# Altium PCB 不带sbus的8通接收机.PcbDoc
Units mm, origin at the board's own origin, x right, y up, seen from the top; angles counter-clockwise.
Board outline 25.4 x 22.35 mm, 2 copper layers (Top Layer, Bottom Layer), stack 1.271 mm thick; 17 components, 29 nets, 96 pads, 46 vias.
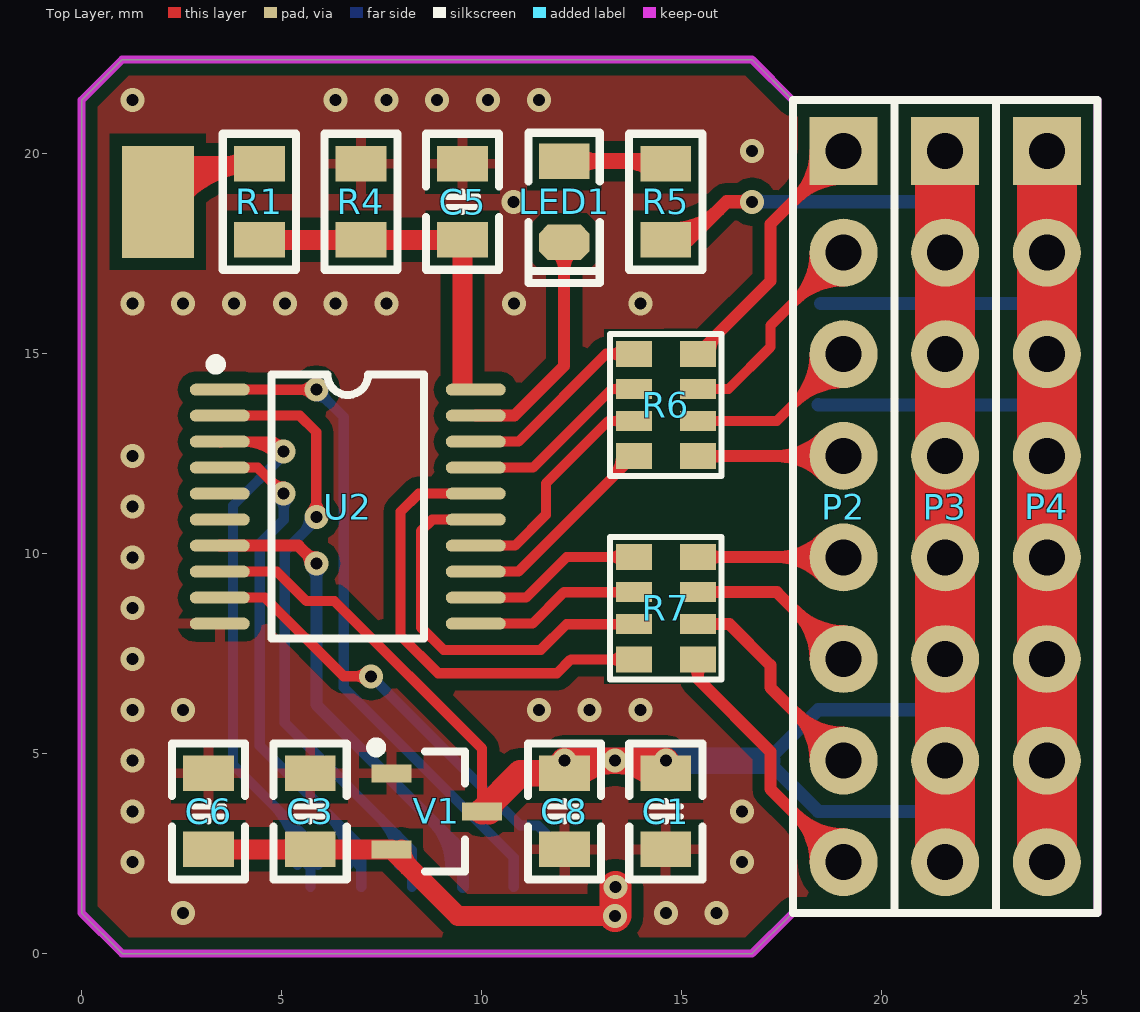
[diagram p0: Top Layer view]
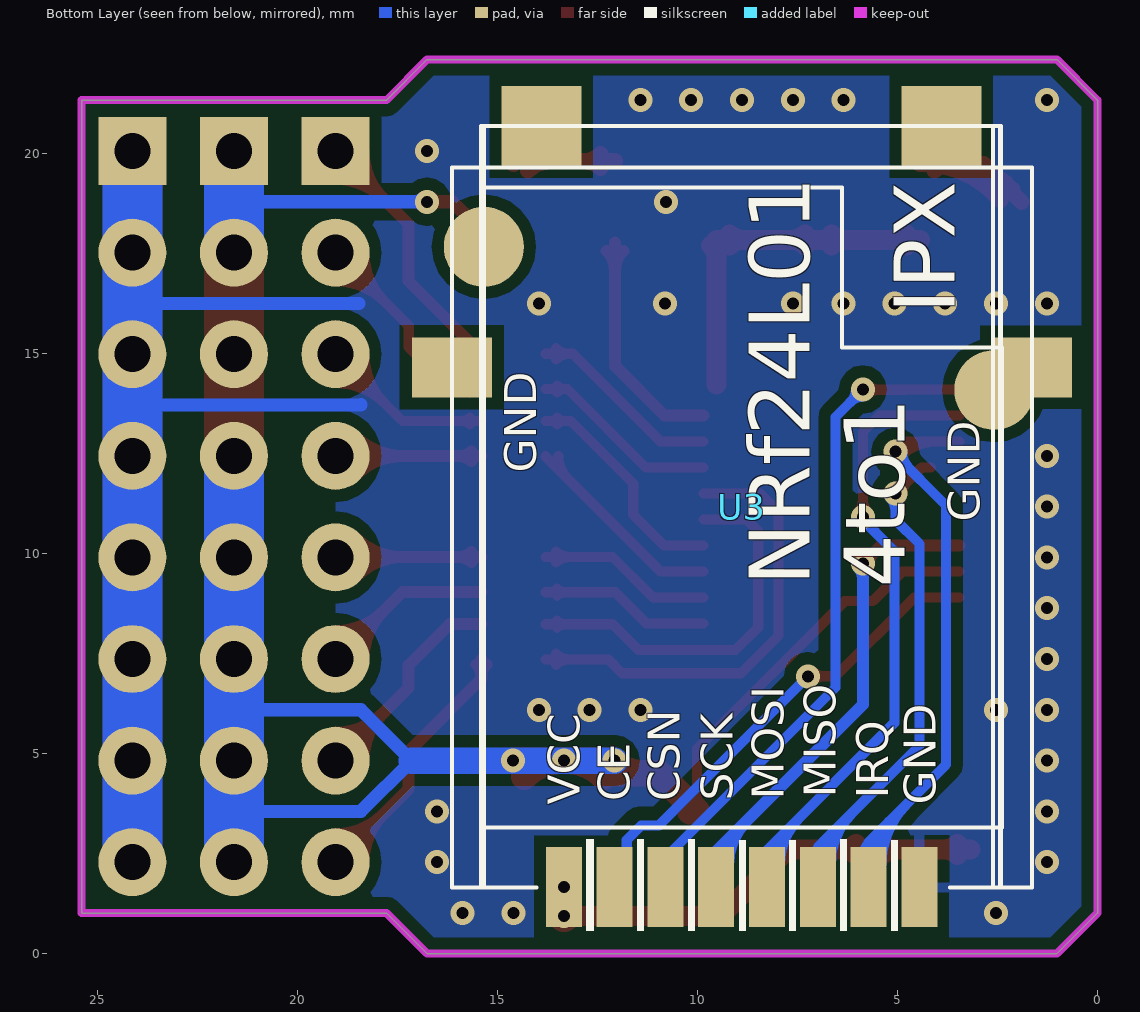
[diagram p1: Bottom Layer view, seen from below]

## Layer stack, top to bottom
Top Solder: solder mask 0.0102, Solder Resist, Dk 3.5
Top Layer: signal copper 0.0356
Dielectric1: core 1.2, FR-4, Dk 4.8
Bottom Layer: signal copper 0.0356
Bottom Solder: solder mask 0.0102, Solder Resist, Dk 3.5

## Board outline
0,1.016 1.016,0 16.764,0 17.78,1.016 25.4,1.016 25.4,21.336 17.78,21.336 16.764,22.352 1.016,22.352 0,21.336

## Design rules (kind name [scope] priority, off if disabled: settings)
Clearance [All] p1: gap=0.2 ignorepadtopadclearanceinfootprint=FALSE except(0.3: Arc-Text Track-Text)
ComponentClearance [All] p1 off: gap=0.254 collisioncheckmode=3 verticalgap=0.254 showdistances=FALSE
Creepage [All] p1: checkdistance=0.254
PolygonConnect PolygonConnect_1 [All] p1: connectstyle=Relief reliefconductorwidth=0.254 reliefentries=4 polygonreliefangle="90 Angle" airgapwidth=0.254
PolygonConnect GND [InNet('GND')] p2: connectstyle=Direct reliefconductorwidth=0.254 reliefentries=4 polygonreliefangle="90 Angle" airgapwidth=0.254
RoutingVias [All] p1: holewidth=0.711 width=1.27 viastyle="Through Hole" minholewidth=0.711 minwidth=1.27 maxholewidth=0.711 maxwidth=1.27
SilkToSolderMaskClearance SilkscreenOverComponentPads [IsPad] p1: minsilkscreentomaskgap=0.254 clearancetoexposedcopper=TRUE
SolderMaskExpansion [All] p1: expansion=0.102 istentingtop=FALSE
UnRoutedNet [All] p1: checkbadconnections=TRUE
Width [All] p1: maxlimit=2 minlimit=0.254 preferedwidth=0.254
27 further rules are at their usual default settings.

## Components (designator, comment, footprint, x,y, rotation, side; value= is the part's Value field where it differs from the comment)
C1 "10V10uF" "C 0805_L" 14.605,3.556 r90 top
C3 "10V10uF" "C 0805_L" 5.715,3.556 r270 top
C5 "0.1uF" "C 0805_L" 9.525,18.796 r270 top
C6 "0.1uF" "C 0805_L" 3.175,3.556 r270 top
C8 "0.1uF" "C 0805_L" 12.072,3.556 r90 top
LED1 "蓝色" "LED 0805B" 12.065,18.796 r270 top
P2 "Header 8" HDR2.54-LI-8P 19.05,11.176 r270 top
P3 "Header 8" HDR2.54-LI-8P 21.59,11.176 r270 top
P4 "Header 8" HDR2.54-LI-8P 24.13,11.176 r270 top
R1 "20K" "R 0805_L" 4.445,18.796 r270 top
R4 "10K" "R 0805_L" 6.985,18.796 r270 top
R5 "1K" "R 0805_L" 14.605,18.796 r270 top
R6 "1K" RCA-8P4R-0603 14.605,13.716 r270 top
R7 "1K" RCA-8P4R-0603 14.605,8.636 r270 top
U2 "STC15W408AS_TSSOP20" TSSOP20_N 6.655,11.176 r0 top
U3 "nrf24l01" NRF24L01_4TO1 8.89,11.176 r180 bottom
V1 "662K" SOT23-3L 8.89,3.556 r270 top

## Footprints (in the part's own frame and the unit in brackets; to place one, negate y for a bottom-side part, rotate by r counter-clockwise, add the part's x,y. Pads: shape width x height; smd on the part's side, far side on the other; paste and mask are expansions set on the pad)
"C 0805_L" [mil]
  rect 35x50 smd: 1(-37.4,0) 2(37.4,0)
  silkscreen extent -67,-36 67,36, body extent -39,-24 39,24, height 20
HDR2.54-LI-8P [mm]
  rect 1.7x1.7 hole 0.9: 1(-8.89,0)
  round 1.7 hole 0.9: 2(-6.35,0) 3(-3.81,0) 4(-1.27,0) 5(1.27,0) 6(3.81,0) 7(6.35,0) 8(8.89,0)
  silkscreen extent -10.16,-1.27 10.16,1.27, body extent -10.16,-1.27 10.16,1.27, height 8.5
"LED 0805B" [mil]
  rect 35x50 smd: 1(-40,0)
  oct 35x50 smd: 2(40,0)
  silkscreen extent -68,-35 80,35, body extent -39,-25 39,25, height 32
NRF24L01_4TO1 [mm]
  rect 2x1.5 smd: 0(-7.25,3.482) 0(7.25,3.482)
  round 2 smd: 0(-6.452,6.495) 0(6.308,2.915)
  rect 0.9x2 smd: 1(-4.453,-9.512) 2(-3.183,-9.512) 3(-1.913,-9.512) 4(-0.643,-9.512) 5(0.627,-9.512) 6(1.897,-9.512) 7(3.167,-9.512) 8(4.437,-9.512)
  rect 2x2 smd: 9(-5.015,9.512) 10(4.985,9.512)
  silkscreen extent -7.25,-10.61 7.25,9.51, body extent -7.19,-9.5 7.21,9.53, height 2.1
"R 0805_L" [mil]
  rect 35x50 smd: 1(-37.4,0) 2(37.4,0)
  silkscreen extent -67,-36 67,36, body extent -39,-25 39,25, height 20
RCA-8P4R-0603 [mm]
  rect 0.65x0.9 smd: 1(-1.28,-0.8) 4(1.28,-0.8) 5(1.28,0.8) 8(-1.28,0.8)
  rect 0.5x0.9 smd: 2(-0.4,-0.8) 3(0.4,-0.8) 6(0.4,0.8) 7(-0.4,0.8)
  silkscreen extent -1.78,-1.4 1.78,1.4, body extent -1.6,-0.8 1.6,0.8, height 0.6
SOT23-3L [mm] "3x1.3"
  rect 0.45x1 smd: 1(-0.95,-1.143) 2(0.95,-1.143) 3(0,1.125)
  silkscreen extent -1.72,-1.65 1.5,0.7, body extent -1.5,-1.2 1.5,1.2, height 1.05
TSSOP20_N [mm]
  oval 1.5x0.3 smd: 1(-3.2,2.925) 2(-3.2,2.275) 3(-3.2,1.625) 4(-3.2,0.975) 5(-3.2,0.325) 6(-3.2,-0.325) 7(-3.2,-0.975) 8(-3.2,-1.625) 9(-3.2,-2.275) 10(-3.2,-2.925) 11(3.2,-2.925) 12(3.2,-2.275) 13(3.2,-1.625) 14(3.2,-0.975) 15(3.2,-0.325) 16(3.2,0.325) 17(3.2,0.975) 18(3.2,1.625) 19(3.2,2.275) 20(3.2,2.925)
  silkscreen extent -3.43,-3.3 1.9,3.69, body extent -3.2,-3.25 3.2,3.25, height 1.03

## Part data
LED1: library part LED-SMD, "贴?"
U2: library part "STC15W401AS_SOP20_DIP20 _TSS"

## Free pads (board coordinates)
  rect 1.8x2.8 smd: 1(1.905,18.796)

## Via types
v1: diameter 0.6, hole 0.3, Top Layer to Bottom Layer, tented both sides, 46 vias

## Nets (pads, with @x,y where several pads share a name; then routed paths per layer and width w, separated by ;. In a path a pad name is that pad's centre, name@x,y a point inside that pad or via, vN(x,y) a via of type N, cw(c..) or ccw(c..) an arc to the next point about the centre after c; other vN are vias at no path point)
3.3V: C3.2 C6.2 U3.1 V1.2 | length 14.3
  Top Layer w0.5: C6.2 V1.2 9.413,0.94 v1(13.335,0.94) ; C6.2@3.503,2.469 cw(c3.835,2.137) 3.835,2.606 cw(c3.835,3.076) C6.2@3.503,2.744 ; C3.2@5.387,2.469 ccw(c5.055,2.137) 5.055,2.606 ccw(c5.055,3.076) C3.2@5.387,2.744 ; C3.2@6.043,2.469 cw(c6.375,2.137) 6.375,2.606 cw(c6.375,3.076) C3.2@6.043,2.744 ; V1.2@7.997,2.606 ccw(c8.601,2.606) 8.174,2.179
  Top Layer w0.8: v1(13.335,0.94) 13.343,0.948 v1(13.343,1.664)
3S: pad.1 R1.1 | length 8.1
  Top Layer w0.4: pad.1 2.855,19.746 R1.1 ; pad.1@2.13,19.098 cw(c3.561,17.842) 3.561,19.746 ; pad.1@2.431,18.834 cw(c4.445,17.067) R1.1 ; pad.1@2.605,19.296 cw(c3.088,19.296) pad.1@2.746,19.637 ; R1.1@4.082,19.573 ccw(c3.664,19.156) 3.664,19.746 ccw(c3.664,20.336) R1.1@4.082,19.919
ADC: C5.2 R1.2 R4.2 U2.20 | length 12.4
  Top Layer w0.5: R1.2 R4.2 C5.2 U2.20@9.525,14.224 ; R1.2@4.773,17.709 cw(c5.105,17.377) 5.105,17.846 cw(c5.105,18.316) R1.2@4.773,17.984 ; R4.2@6.657,17.709 ccw(c6.325,17.377) 6.325,17.846 ccw(c6.325,18.316) R4.2@6.657,17.984 ; R4.2@7.313,17.709 cw(c7.645,17.377) 7.645,17.846 cw(c7.645,18.316) R4.2@7.313,17.984 ; C5.2@9.197,17.709 ccw(c8.865,17.377) 8.865,17.846 ccw(c8.865,18.316) C5.2@9.197,17.984 ; C5.2@9.387,17.709 cw(c9.055,17.377) 9.525,17.377 cw(c9.994,17.377) C5.2@9.662,17.709
CE: U2.9 U3.2 | length 11.9
  Top Layer w0.254: U2.9 4.586,8.901 6.553,6.934 v1(7.239,6.934) ; v1@7.117,6.812 ccw(c6.821,6.517) 6.821,6.934 ccw(c6.821,7.352) v1@7.117,7.057
  Bottom Layer w0.254: v1(7.239,6.934) 10.969,3.204 11.407,3.204 11.77,2.841 U3.2@11.77,2.376
CH1: R6.1 U2.18 | length 5.6
  Top Layer w0.254: U2.18 10.921,12.801 13.116,14.996 R6.1 ; R6.1@13.54,14.856 ccw(c13.202,14.518) 13.202,14.996 ccw(c13.202,15.474) R6.1@13.54,15.136
CH2: R6.2 U2.17 | length 5.2
  Top Layer w0.254: U2.17 11.287,12.151 13.252,14.116 R6.2 ; R6.2@13.518,14.029 ccw(c13.308,13.819) 13.308,14.116 ccw(c13.308,14.413) R6.2@13.518,14.203
CH3: R6.3 U2.14 | length 6.2
  Top Layer w0.254: U2.14 10.836,10.201 11.608,10.973 11.608,11.753 13.171,13.316 R6.3 ; R6.3@13.518,13.229 ccw(c13.308,13.019) 13.308,13.316 ccw(c13.308,13.613) R6.3@13.518,13.403
CH4: R6.4 U2.13 | length 5.8
  Top Layer w0.254: U2.13 10.92,9.551 R6.4 ; 13.254,11.885 ccw(c12.702,12.436) R6.4@13.482,12.436
CH5: R7.1 U2.12 | length 5.1
  Top Layer w0.254: U2.12 11.111,8.901 12.126,9.916 R7.1 ; R7.1@13.54,9.776 ccw(c13.202,9.438) 13.202,9.916 ccw(c13.202,10.394) R7.1@13.54,10.056
CH6: R7.2 U2.11 | length 4.7
  Top Layer w0.254: U2.11 11.274,8.251 12.059,9.036 R7.2 ; R7.2@13.518,8.949 ccw(c13.308,8.739) 13.308,9.036 ccw(c13.308,9.333) R7.2@13.518,9.123
CH7: R7.3 U2.15 | length 10.2
  Top Layer w0.254: U2.15 8.768,10.851 8.484,10.566 8.484,8.161 9.05,7.595 11.481,7.595 12.122,8.236 R7.3 ; R7.3@13.518,8.149 ccw(c13.308,7.939) 13.308,8.236 ccw(c13.308,8.533) R7.3@13.518,8.323
CH8: R7.4 U2.16 | length 12.3
  Top Layer w0.254: U2.16 8.428,11.501 7.976,11.049 7.976,7.95 8.915,7.01 11.887,7.01 12.233,7.356 R7.4 ; R7.4@13.54,7.216 ccw(c13.202,6.878) 13.202,7.356 ccw(c13.202,7.834) R7.4@13.54,7.496
CSN: U2.1 U3.3 | length 18.2
  Top Layer w0.254: U2.1 4.83,14.101 4.834,14.097 v1@5.867,14.097 ; 5.44,14.097 ccw(c5.44,14.528) v1@5.745,14.223 ; 5.459,14.097 cw(c5.459,13.693) v1@5.745,13.979
  Bottom Layer w0.254: v1@5.867,13.928 cw(c5.867,13.51) 6.163,13.806 cw(c6.458,14.101) v1@6.04,14.101 ; v1(5.867,14.101) 6.553,13.415 6.553,6.655 10.803,2.405 U3.3
GND: C1.1 C3.1 C5.1 C6.1 C8.1 P4.1 P4.2 P4.3 P4.4 P4.5 P4.6 P4.7 P4.8 R4.1 U2.10 U3.8 V1.1 | length 46.9
  Top Layer w1.5: P4.8 P4.7 P4.6 P4.5 P4.4 P4.3 P4.2 P4.1
  Bottom Layer w0.33: 18.415,13.723 18.422,13.716 24.13,13.716 ; 18.47,16.256 24.13,16.256
  Bottom Layer w1.5: P4.8 P4.7 P4.6 P4.5 P4.4 24.13,13.716 P4.3 24.13,16.256 P4.2 P4.1
  other v1: 2.54,1.016 14.605,1.016 15.875,1.016 1.27,2.286 16.51,2.286 1.27,3.556 16.51,3.556 1.27,4.826 1.27,6.096 2.54,6.096 11.43,6.096 12.7,6.096 13.97,6.096 1.27,7.366 1.27,8.636 1.27,9.906 1.27,11.176 1.27,12.446 1.27,16.256 2.54,16.256 3.81,16.256 5.08,16.256 6.35,16.256 7.62,16.256 10.815,16.256 13.97,16.256 10.795,18.796 16.764,20.066 1.27,21.336 6.35,21.336 7.62,21.336 8.89,21.336 10.16,21.336 11.43,21.336
IRQ: U2.3 U3.7 | length 20.7
  Top Layer w0.254: U2.3@3.48,12.776 U2.3 4.801,12.801 ; U2.3@4.025,12.801 cw(c4.025,11.518) v1@4.932,12.425 ; 4.638,12.801 cw(c4.638,12.131) v1@5.112,12.605 ; v1@4.883,12.567 ccw(c4.6,12.6) 4.801,12.801 ; v1@5.035,12.719 cw(c5.002,13.002) 4.801,12.801 ; v1(5.055,12.548) 4.801,12.801
  Bottom Layer w0.254: 4.705,12.122 ccw(c4.28,12.548) v1@4.882,12.548 ; 4.765,3.747 cw(c3.231,2.214) U3.7@5.4,2.214 ; v1@5.029,12.446 3.788,11.204 3.788,4.724 5.723,2.789 ; 5.198,3.314 cw(c4.099,2.214) U3.7@5.654,2.214 ; U3.7@5.555,2.49 ccw(c5.372,2.789) 5.723,2.789 ; 5.632,2.88 cw(c4.966,2.214) U3.7@5.908,2.214 ; U3.7 5.723,2.789 ; U3.7@5.891,2.49 cw(c6.074,2.789) 5.723,2.789
LED: LED1.2 U2.19 | length 6.9
  Top Layer w0.3: U2.19 10.82,13.451 12.065,14.696 LED1.2 ; LED1.2@11.857,17.572 cw(c11.354,17.069) 12.065,17.069 cw(c12.776,17.069) LED1.2@12.273,17.572
MISO: U2.4 U3.6 | length 16
  Top Layer w0.254: U2.4@4.166,12.151 4.405,12.151 v1(5.055,11.501) ; v1@4.882,11.501 ccw(c4.464,11.501) 4.759,11.796 ccw(c5.055,12.092) v1@5.055,11.674
  Bottom Layer w0.254: v1@4.932,11.379 cw(c4.637,11.083) 5.055,11.083 cw(c5.472,11.083) v1@5.177,11.379 ; v1(5.055,11.501) 5.055,10.846 4.453,10.244 4.453,5.199 6.993,2.659 U3.6 ; 6.127,3.525 cw(c4.815,2.214) U3.6@6.67,2.214 ; 6.56,3.092 cw(c5.683,2.214) U3.6@6.924,2.214
MOSI: U2.2 U3.5 | length 18.8
  Top Layer w0.254: U2.2 5.457,13.451 5.842,13.066 5.867,13.04 v1(5.867,10.922) ; v1@5.745,11.044 ccw(c5.45,11.34) 5.867,11.34 ccw(c6.285,11.34) v1@5.99,11.044
  Bottom Layer w0.254: 5.518,10.497 ccw(c5.093,10.922) v1@5.694,10.922 ; v1@5.842,10.82 5.08,10.058 5.08,5.771 8.263,2.588 U3.5 ; 7.447,3.405 cw(c6.256,2.214) U3.5@7.94,2.214 ; 7.88,2.971 cw(c7.123,2.214) U3.5@8.194,2.214
NetLED1_1: LED1.1 R5.1 | length 4.1
  Top Layer w0.4: LED1.1 14.539,19.812 R5.1 ; LED1.1@12.428,19.639 cw(c12.846,19.222) 12.846,19.812 cw(c12.846,20.402) LED1.1@12.428,19.985 ; 13.665,19.812 cw(c13.665,18.997) R5.1@14.242,19.573
NetP2_1: P2.1 R6.8 | length 11.3
  Top Layer w0.3: R6.8 17.221,16.812 17.221,18.237 P2.1 ; R6.8@15.705,14.996 cw(c16.429,14.996) 15.917,15.508 ; P2.1@18.35,20.066 cw(c16.66,20.066) 17.855,18.871 cw(c19.05,17.676) P2.1@19.05,19.366 ; P2.1@18.65,20.066 cw(c17.684,20.066) 18.367,19.383 cw(c19.05,18.7) P2.1@19.05,19.666
NetP2_2: P2.2 R6.7 | length 10.4
  Top Layer w0.254: R6.7 16.173,14.116 17.221,15.164 17.221,15.697 P2.2 ; R6.7@15.692,14.029 cw(c15.902,13.819) 15.902,14.116 cw(c15.902,14.413) R6.7@15.692,14.203 ; P2.2@18.327,17.526 cw(c16.582,17.526) 17.816,16.292 cw(c19.05,15.058) P2.2@19.05,16.803 ; P2.2@18.581,17.526 cw(c17.449,17.526) 18.249,16.725 cw(c19.05,15.925) P2.2@19.05,17.057
NetP2_3: P2.3 R6.6 | length 9.3
  Top Layer w0.254: R6.6 17.38,13.316 P2.3 ; R6.6@15.692,13.229 cw(c15.902,13.019) 15.902,13.316 cw(c15.902,13.613) R6.6@15.692,13.403 ; P2.3@18.327,14.986 cw(c16.582,14.986) 17.816,13.752 cw(c19.05,12.518) P2.3@19.05,14.263 ; P2.3@18.581,14.986 cw(c17.449,14.986) 18.249,14.185 cw(c19.05,13.385) P2.3@19.05,14.517
NetP2_4: P2.4 R6.5 | length 8.5
  Top Layer w0.3: R6.5 19.04,12.436 P2.4 ; R6.5@15.654,12.312 cw(c15.952,12.014) 15.952,12.436 cw(c15.952,12.858) R6.5@15.654,12.56 ; 17.336,12.436 ccw(c17.336,14.16) P2.4@18.555,12.941 ; 17.384,12.436 cw(c17.384,10.78) P2.4@18.555,11.951 ; 18.06,12.436 ccw(c18.06,13.436) P2.4@18.767,12.729 ; 18.108,12.436 cw(c18.108,11.504) P2.4@18.767,12.163
NetP2_5: P2.5 R7.8 | length 8.5
  Top Layer w0.3: R7.8 19.04,9.916 P2.5 ; R7.8@15.654,9.792 cw(c15.952,9.494) 15.952,9.916 cw(c15.952,10.338) R7.8@15.654,10.04 ; 17.336,9.916 cw(c17.336,8.192) P2.5@18.555,9.411 ; 17.384,9.916 ccw(c17.384,11.572) P2.5@18.555,10.401 ; 18.06,9.916 cw(c18.06,8.916) P2.5@18.767,9.623 ; 18.108,9.916 ccw(c18.108,10.848) P2.5@18.767,10.189
NetP2_6: P2.6 R7.7 | length 8.5
  Top Layer w0.3: R7.7 17.38,9.036 P2.6 ; P2.6@18.35,7.366 ccw(c16.66,7.366) 17.855,8.561 ccw(c19.05,9.756) P2.6@19.05,8.066 ; P2.6@18.65,7.366 ccw(c17.684,7.366) 18.367,8.049 ccw(c19.05,8.732) P2.6@19.05,7.766
NetP2_7: P2.7 R7.6 | length 9.6
  Top Layer w0.3: R7.6 16.199,8.236 17.221,7.214 17.221,6.655 P2.7 ; P2.7@18.35,4.826 ccw(c16.66,4.826) 17.855,6.021 ccw(c19.05,7.216) P2.7@19.05,5.526 ; P2.7@18.65,4.826 ccw(c17.684,4.826) 18.367,5.509 ccw(c19.05,6.192) P2.7@19.05,5.226
NetP2_8: P2.8 R7.5 | length 11.4
  Top Layer w0.3: R7.5@15.281,7.232 cw(c14.983,6.934) 15.405,6.934 cw(c15.827,6.934) R7.5@15.529,7.232 ; R7.5 15.405,6.871 17.221,5.055 17.221,4.115 P2.8 ; P2.8@18.35,2.286 ccw(c16.66,2.286) 17.855,3.481 ccw(c19.05,4.676) P2.8@19.05,2.986 ; P2.8@18.65,2.286 ccw(c17.684,2.286) 18.367,2.969 ccw(c19.05,3.652) P2.8@19.05,2.686
SCK: U2.7 U3.4 | length 15.2
  Top Layer w0.3: U2.7 5.42,10.201 v1(5.867,9.754) ; v1@5.717,9.754 ccw(c5.355,9.754) 5.611,10.01 ccw(c5.867,10.266) v1@5.867,9.904
  Bottom Layer w0.3: v1@5.761,9.648 cw(c5.505,9.391) 5.867,9.391 cw(c6.23,9.391) v1@5.973,9.648 ; v1(5.867,9.754) 5.867,6.223 9.533,2.557 U3.4 ; 8.778,3.312 cw(c7.679,2.214) U3.4@9.233,2.214 ; 9.29,2.8 cw(c8.703,2.214) U3.4@9.533,2.214
VCC: C1.2 C8.2 P3.1 P3.2 P3.3 P3.4 P3.5 P3.6 P3.7 P3.8 R5.2 U2.8 V1.3 | length 74.7
  Top Layer w0.254: U2.8 4.886,9.551 5.623,8.814 6.322,8.814 10.015,5.121 V1.3 ; V1.3@9.946,3.625 ccw(c9.778,3.793) 10.015,3.793 ccw(c10.252,3.793) V1.3@10.084,3.625
  Top Layer w0.33: R5.2 15.179,17.846 16.129,18.796 v1(16.764,18.796) ; R5.2@14.795,17.796 ccw(c14.795,18.6) 15.364,18.031 ; R5.2@14.795,18.126 ccw(c14.795,19.727) 15.928,18.595 ; v1@16.669,18.701 ccw(c16.438,18.47) 16.438,18.796 ccw(c16.438,19.122) v1@16.669,18.891
  Top Layer w0.5: C8.2 C8.2@12.072,4.825
  Top Layer w0.66: V1.3 10.965,4.506 C8.2 ; V1.3@10.185,3.556 cw(c10.595,3.556) 10.305,3.846 ; 11.373,4.506 ccw(c11.373,5.526) C8.2@12.094,4.805 ; C8.2@12.072,4.825 C1.2@14.608,4.825 ; C8.2@12.343,4.425 cw(c13.308,3.46) v1@13.308,4.825 ; v1@13.369,4.825 cw(c13.369,3.46) C1.2@14.334,4.425
  Top Layer w1.5: P3.8 P3.7 P3.6 P3.5 P3.4 P3.3 P3.2 P3.1
  Bottom Layer w0.33: v1(16.764,18.796) 21.59,18.796 ; v1@16.859,18.701 cw(c17.09,18.47) 17.09,18.796 cw(c17.09,19.122) v1@16.859,18.891 ; 21.59,3.556 18.415,3.556 17.145,4.826 18.415,6.096 21.59,6.096
  Bottom Layer w0.66: v1(12.073,4.826) v1(13.335,4.826) v1(14.609,4.826) 17.145,4.826
  Bottom Layer w1.5: P3.8 21.59,3.556 P3.7 21.59,6.096 P3.6 P3.5 P3.4 ; P3.2 21.59,18.796 P3.1
pads on no net: U2.5 U2.6 U3.0 U3.9 U3.10

## Polygon pours and split planes (outlines as drawn)
GND on Top Layer "Bottom Layer-No Net" (solid, remove dead copper, pour order 4): 19.04,22.352 0,22.352 0,0 19.05,0
GND on Bottom Layer "Bottom Layer-No Net" (solid, remove dead copper, pour order 6): 19.05,22.352 0,22.352 0,-0.254 0,0 19.05,0

## Keep-outs
Keep-Out Layer:
  the board outline again, w0.2

## Silkscreen, mask and mechanical layers (free items; w line width, h text height)
Bottom Solder:
  drawing of 334 lines, arcs and shapes, not listed

## Text inside footprints (layer, text, board x,y; h text height)
U3: Bottom Overlay "IPX" at 3.573,15.995 h1.52 r270; Bottom Overlay "NRf24L01" at 7.198,9.195 h1.52 r270; Bottom Overlay "4to1" at 4.826,9.144 h1.52 r270; Bottom Overlay "VCC" at 12.95,3.728 h0.8 r270; Bottom Overlay "GND" at 14.03,12.028 h0.8 r270; Bottom Overlay "CE" at 11.69,3.808 h0.8 r270; Bottom Overlay "CSN" at 10.44,3.808 h0.8 r270; Bottom Overlay "SCK" at 9.12,3.828 h0.8 r270; Bottom Overlay "MOSI" at 7.84,3.848 h0.8 r270; Bottom Overlay "MISO" at 6.54,3.898 h0.8 r270; Bottom Overlay "IRQ" at 5.23,3.878 h0.8 r270; Bottom Overlay "GND" at 4.05,3.728 h0.8 r270; Bottom Overlay "GND" at 2.948,10.795 h0.8 r270